# Altium PCB DE-290817.PcbDoc (part 2 of 2)
Units mil, origin at the board's own origin, x right, y up, seen from the top; angles counter-clockwise.
Board outline 2755.91 x 5118.11 mil, 2 copper layers (Top Layer, Bottom Layer); 176 components, 108 nets, 554 pads, 271 vias.
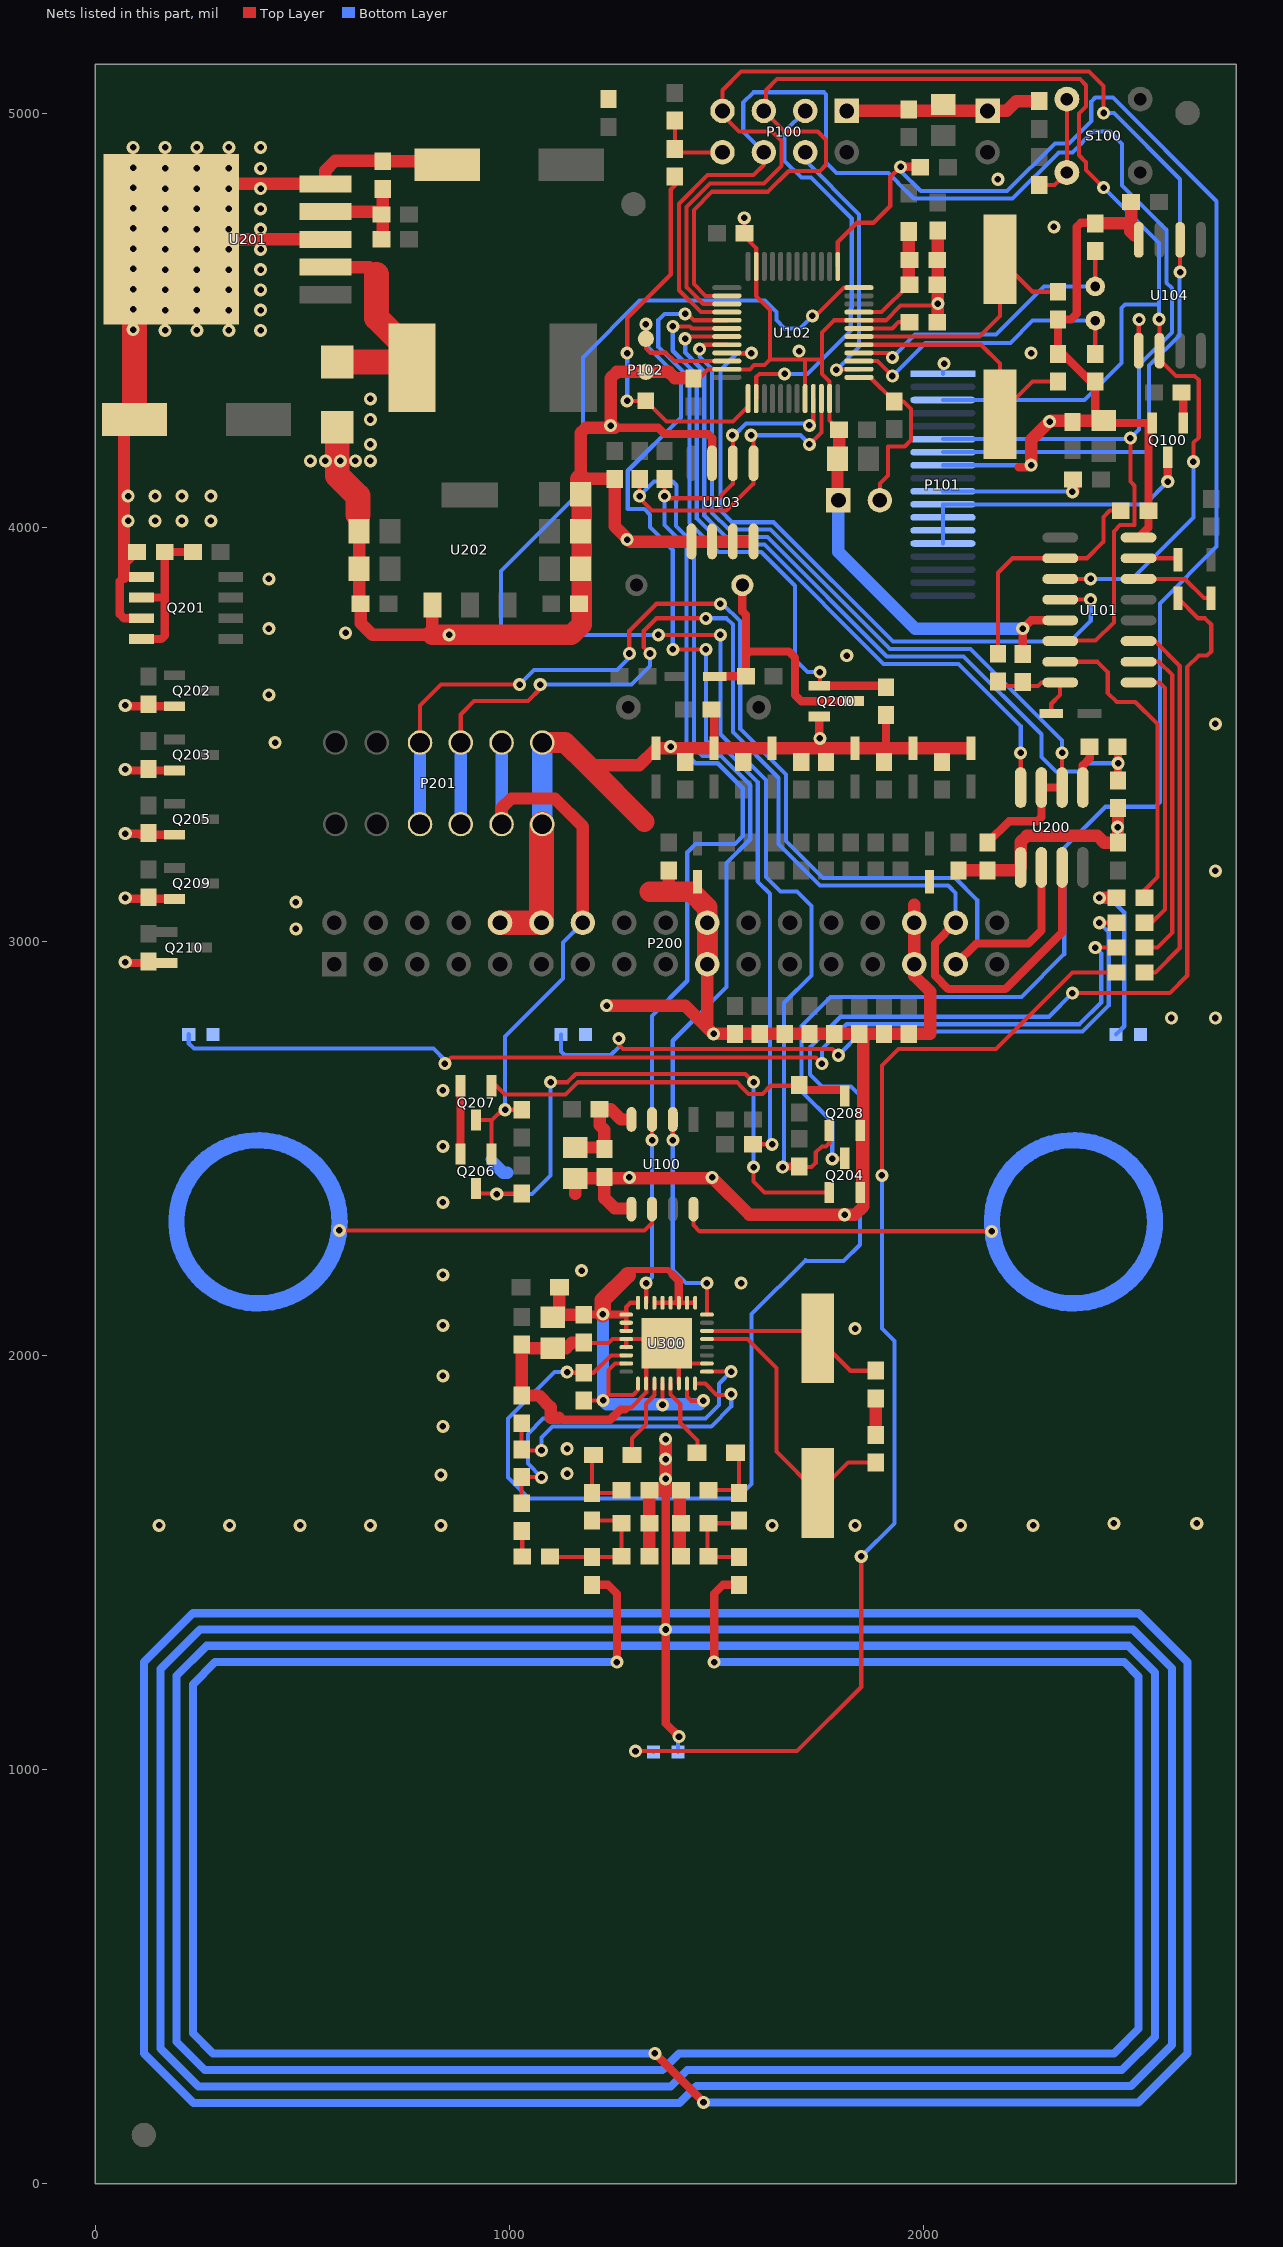
[diagram p2: the nets of this part, all layers, seen from the top]

## Via types
v1: diameter 31.5, hole 15.75, Top Layer to Bottom Layer, 271 vias

## Nets (pads, with @x,y where several pads share a name; then routed paths per layer and width w, separated by ;. In a path a pad name is that pad's centre, name@x,y a point inside that pad or via, vN(x,y) a via of type N, cw(c..) or ccw(c..) an arc to the next point about the centre after c; other vN are vias at no path point) (continued)
I2C1_SCL: R112.1 U100.3 U102.45 U103.6 U300.31 | length 2871.2
  Top Layer w10: U300.31@1330.79,2127.44 v1(1330.79,2175) ; v1(1345,2520) U100.3@1345,2570 ; R112.1@1375,4116.54 v1(1375,4075) 1375,4070 1505,4070 1540,4105 U103.6@1540,4154.49 1540,4221 v1(1539,4222) ; v1(1725,4246) 1734.21,4255.21 U102.45@1734.21,4310.55
  Bottom Layer w10: v1(1330.79,2175) 1345,2189.21 v1(1345,2520) 1345,2820 1430,2905 1430,3215 1450,3235 1545,3235 1564,3254 1564,3369.63 1503.63,3430 1450,3430 1428,3452 1428,3952 1375,4005 v1(1375,4075) ; v1(1539,4222) 1543.34,4222 1572.09,4250.75 1720.25,4250.75 v1(1725,4246)
I2C1_SDA: R111.1 U100.2 U102.46 U103.5 U300.24 | length 3153.7
  Top Layer w10: R111.1@1315,4116.54 v1(1315,4075) 1315,4070 1345,4040 1525,4040 1590,4105 U103.5@1590,4154.49 1590,4216 v1(1584,4222) ; v1(1395,2520) U100.2@1395,2570 ; U300.24@1477.44,2098.9 v1(1477.44,2175) ; v1(1725,4200) 1753.9,4228.9 U102.46@1753.9,4310.55
  Bottom Layer w10: v1(1315,4075) 1350,4110 1395,4110 1403.75,4101.25 1403.75,4063.09 1403,4062.34 1403,4002.46 1446,3959.46 1446,3469 1467,3448 1511.09,3448 1582,3377.09 1582,3246.54 1525,3189.54 1525,2890 1395,2760 v1(1395,2520) 1395,2207 1427,2175 v1(1477.44,2175) ; v1(1584,4222) 1703,4222 v1(1725,4200)
LED_DOOR_BELL: R100.2 U101.2 | length 799.2
  Top Layer w10: U101.2@2519.49,3675 2569,3675 2601,3643 2601,3021 2565,2985 R100.2@2533.46,2985
LED_HANDMAID: R103.2 U101.15 | length 758.7
  Top Layer w10: U101.15@2330.51,3675 2420,3675 2445,3650 2445,3600 2467,3578 2511.6,3578 2565,3524.6 2565,3155 2533.46,3123.46 R103.2@2533.46,3105
LED_RFID_READER: R106.2 U101.3 | length 915.3
  Top Layer w10: U101.3@2519.49,3725 2559,3725 2619,3665 2619,2984 2560,2925 R106.2@2533.46,2925
LED_ROOM_STATUS: R102.2 U101.1 | length 666.7
  Top Layer w10: U101.1@2519.49,3625 2570,3625 2583,3612 2583,3077 2551,3045 R102.2@2533.46,3045
NetC103_1: C103.1 D103.1 R104.1 U101.16 | length 238
  Top Layer w10: R104.1@2180,3616.54 2240,3616.54 2276.54,3616.54 2285,3625 U101.16@2330.51,3625 2330,3624.49 2330,3595 2308.74,3573.74 D103.1@2308.74,3550
NetC104_2: C104.2 R104.2 U101.10 | length 600.4
  Top Layer w10: R104.2@2180,3683.46 2180,3890 2215,3925 U101.10@2330.51,3925 2395,3925 2435,3965 2435,4025 2450,4040 C104.2@2476.54,4040
NetC105_1: C105.1 C106.2 R105.1 U100.4 | length 244.8
  Top Layer w30: C106.2@1160,2502.4 1226.06,2502.4 C105.1@1230,2498.46 1230,2545 1218.46,2556.54 R105.1@1218.46,2595 1245,2595 1270,2570 1280,2570
NetC113_1: C113.1 U102.7 | length 133.4
  Top Layer w10: U102.7@1844.45,4479.84 1924.84,4479.84 1940,4495 C113.1@1971.54,4495
NetC121_2: C121.2 C122.2 L100.2 U102.9 | length 276.5
  Top Layer w10: U102.9@1844.45,4519.21 1899.21,4519.21 1965,4585 C122.2@1965,4586.54
  Top Layer w30: C122.2@1965,4586.54 L100.2@1965,4713.74
NetC211_2: C211.2 R234.1 R235.1 U201.4 | length 261.2
  Top Layer w30: U201.4@556.22,4761.93 684.61,4761.93 C211.2@691.54,4755 ; R235.1@691.54,4695 695,4698.46 R234.1@695,4816.54
NetC304_1: C304.1 C305.1 C306.2 C308.2 R303.2 | length 328.3
  Top Layer w10: C304.1@1098.46,1515 1100,1513.46 R303.2@1200,1513.46 1269.57,1513.46 C308.2@1271.54,1515.43 C306.2@1271.54,1595 1265,1601.54 C305.1@1200,1601.54
NetC304_2: C304.2 R302.1 | length 62.2
  Top Layer w10: R302.1@1030,1576.54 1031.54,1575 C304.2@1031.54,1515
NetC305_2: C305.2 C307.2 L301.2 | length 169.5
  Top Layer w10: L301.2@1203.74,1760 1200,1756.26 C305.2@1200,1668.46 1265,1668.46 C307.2@1271.54,1675 C307.2@1270,1676.54
NetC309_1: C309.1 C311.1 C312.1 R304.2 | length 236.2
  Top Layer w10: R304.2@1555,1513.46 1480.43,1513.46 1478.46,1515.43 1478.46,1595 1548.46,1595 C312.1@1555,1601.54
NetC310_1: C310.1 C312.2 L302.2 | length 181.6
  Top Layer w10: C310.1@1480,1676.54 1478.46,1675 1548.46,1675 C312.2@1555,1668.46 1555,1756.26 L302.2@1546.26,1765
NetD100_1: D100.1 R100.1 | length 2534
  Top Layer w10: v1(845,2705) 860,2720 1740,2720 v1(1755,2705) ; v1(2415,2985) R100.1@2466.54,2985
  Bottom Layer w10: D100.1@226.38,2775.59 226.38,2753.62 239,2741 817,2741 845,2713 v1(845,2705) ; v1(1755,2705) 1755,2740 1815,2800 2377,2800 2429.47,2852.47 2429.47,2970.53 v1(2415,2985)
NetD102_1: D102.1 R102.1 | length 1720.6
  Top Layer w10: v1(1265,2765) 1265,2750 1275,2740 1780,2740 v1(1795,2725) ; v1(2425,3045) R102.1@2466.54,3045
  Bottom Layer w10: D102.1@1125.47,2775 1125.47,2734.53 1135,2725 1245,2725 1265,2745 v1(1265,2765) ; v1(1795,2725) 1852,2782 2384.46,2782 2447.47,2845.02 2447.47,3022.53 v1(2425,3045)
NetD104_1: D104.1 R103.1 | length 418.5
  Top Layer w30: v1(2425,3105) R103.1@2466.54,3105
  Bottom Layer w10: v1(2425,3105) 2450,3105 2485,3070 2485,2795.12 D104.1@2465.47,2775.59
NetD105_1: D105.1 R106.1 | length 2858.6
  Top Layer w10: v1(1305,1045) 1695,1045 1850,1200 v1(1850,1515) ; v1(1900,2435) 1900,2700 1940,2740 2175,2740 2360,2925 R106.1@2466.54,2925
  Bottom Layer w10: v1(1305,1045) 1346.73,1045 D105.1@1348.42,1043.31 ; v1(1850,1515) 1930,1595 1930,2035 1900,2065 v1(1900,2435)
NetD106_1: D106.1 U101.6 | length 194.7
  Top Layer w10: U101.6@2519.49,3875 2631,3875 2677.26,3828.74 D106.1@2695,3828.74
NetD107_1: D107.1 U101.7 | length 97.1
  Top Layer w10: U101.7@2519.49,3925 2611.26,3925 D107.1@2615,3921.26
NetD204_2: D204.2 Q200.3 R202.1 R205.2 | length 664.6
  Top Layer w20: D204.2@1496.26,3640 R205.2@1571.54,3640 1571.54,3691.54 ; R202.1@1562.95,3860 1562.95,3797.05 1571.54,3788.46 1571.54,3691.54 ; Q200.3@1831.34,3580 1705,3580 1690,3595 1690,3685 1675,3700 1580,3700 1571.54,3691.54
NetD209_1: D209.1 L200.1 U201.2 | length 577.3
  Top Layer w30: U201.2@556.22,4628.07 661.93,4628.07 680,4610
  Top Layer w60: D209.1@585,4398.74 751.38,4398.74 L200.1@765.12,4385 765.12,4419.88 680,4505 680,4610
NetP101_10: P101.10 R107.2 | length 344.3
  Top Layer w30: v1(2360,4085) 2361.54,4086.54 R107.2@2361.54,4115
  Bottom Layer w10: P101.10@2047.24,4086.61 2047.24,4086.25 2358.75,4086.25 v1(2360,4085)
NetP101_11: P101.11 P101.12 P101.13 P101.14 Q100.3 | length 718.6
  Top Layer w20: v1(2590,4110) Q100.3@2590,4168.66
  Bottom Layer w10: P101.14@2047.24,3960.63 P101.13@2047.24,3992.13 P101.12@2047.24,4023.62 P101.11@2047.24,4055.12 2535.12,4055.12 v1(2590,4110)
NetP103_2: P103.2 R115.1 U102.1 | length 431.8
  Top Layer w10: U102.1@1844.45,4361.73 1871.73,4361.73 R115.1@1930,4303.46 1951.54,4303.46 1970,4285 1970,4210 1955,4195 1915,4195 1915,4125 1895,4105 P103.2@1895,4065
NetQ100_1: Q100.1 R108.2 | length 75.3
  Top Layer w20: R108.2@2623.46,4325 2627.4,4321.06 Q100.1@2627.4,4251.34
NetQ201_2: Q201.2 Q201.4 R220.1 R221.1 | length 385.8
  Top Layer w20: Q201.4@112.13,3730 160,3730 168.46,3738.46 168.46,3830 ; Q201.2@112.13,3830 168.46,3830 ; R220.1@236.54,3940 R221.1@168.46,3940 168.46,3830
NetQ204_1: Q204.1 Q206.3 R224.2 | length 1423.6
  Top Layer w10: Q206.3@923.66,2400 932.13,2391.54 R224.2@1030,2391.54 ; v1(1100,2660) 1140.66,2660 1160.66,2680 1570,2680 v1(1590,2660) ; v1(1590,2455) 1590,2420 1616.34,2393.66 Q204.1@1772.6,2393.66
  Bottom Layer w10: v1(970,2390) 1055,2390 1100,2435 v1(1100,2660) ; v1(1590,2455) v1(1590,2660)
NetQ207_1: Q207.1 Q208.3 R231.1 | length 900.4
  Top Layer w10: Q207.1@957.4,2651.34 968.66,2651.34 990,2630 1136.11,2630 1166.11,2660 1550,2660 1561.25,2648.75 1561.25,2648.09 1578.09,2631.25 1611.25,2631.25 1631.34,2651.34 1697.87,2651.34 R231.1@1700,2653.46
  Top Layer w20: R231.1@1700,2653.46 1712.13,2641.34 Q208.3@1810,2641.34
NetR101_1: R101.1 S100.1 S100.4 | length 256
  Top Layer w10: R101.1@2280,4826.54 2316.54,4826.54 S100.4@2346.42,4856.42 S100.1@2346.42,5033.58
NetR227_1: R227.1 U200.1 | length 105.4
  Top Layer w20: U200.1@2385,3371.46 2385,3425 2401.54,3441.54 R227.1@2401.54,3470
NRF24L01_CE: P100.3 U102.38 | length 959.1
  Top Layer w10: U102.38@1596.42,4310.55 1596.42,4362.33 1604.09,4370 v1(1665,4370)
  Bottom Layer w10: v1(1665,4370) 1720,4370 1824.77,4474.77 1824.77,4527.77 1827,4530 1827,4745.39 1728.34,4844.04 1705.5,4844.04 1665,4884.54 1665,4955 P100.3@1715,5005
NRF24L01_CSN: P100.4 U102.2 | length 673.8
  Top Layer w10: v1(1790,4380) 1782.83,4380 1781.42,4381.42 U102.2@1844.45,4381.42
  Bottom Layer w10: P100.4@1715,4905 1715,4885 1845,4755 1845,4435 v1(1790,4380)
NRF24L01_IRQ: P100.8 R110.2 R114.1 | length 186.6
  Top Layer w10: R114.1@1400,4981.54 R110.2@1400,4913.46 1408.46,4905 P100.8@1515,4905
ONE_WIRE: P200.14 P201.2 Q206.1 Q207.3 R225.1 | length 1435.1
  Top Layer w10: Q207.3@920,2568.66 958.66,2568.66 983.46,2593.46 v1(990,2593.46) R225.1@1030,2593.46 ; 953.66,2568.66 957.4,2564.92 Q206.1@957.4,2486.34
  Top Layer w30: P201.2@981.57,3283.15 981.57,3321.57 1005,3345 1110,3345 1177.95,3277.05 P200.14@1177.95,3045
  Bottom Layer w10: v1(990,2593.46) 990,2770 1130,2910 1130,2997.05 P200.14@1177.95,3045
  Bottom Layer w30: P201.2@981.57,3283.15 P201.2@981.57,3480
ONE_WIRE_RX: Q204.3 R226.2 U102.13 | length 4520.9
  Top Layer w10: v1(1780,2475) 1808.66,2475 Q204.3@1810,2476.34 ; U102.13@1793.27,4629.45 1793.27,4688.27 1840,4735 1879.54,4735 1920,4775.46 1920,4845 v1(1945,4870)
  Top Layer w20: v1(1945,4870) 1991.54,4870 R226.2@1992.54,4869
  Bottom Layer w10: v1(1780,2475) 1780,2564 1706,2638 1706,2796 1776,2866 2237,2866 2340,2969 2340,3225 2440,3325 2560,3325 2571,3336 2571,3816 2708,3953 2708,4787 2458,5037 2415,5037 2405.5,5027.5 2405.5,4980.5 2351.5,4926.5 2317.5,4926.5 2202.25,4811.25 1993.75,4811.25 1945,4860 v1(1945,4870)
ONE_WIRE_TX: Q208.1 R230.1 U102.12 | length 3684.2
  Top Layer w10: v1(1360,3740) v1(1510,3740) ; R230.1@1700,2456.54 1701.54,2455 1730,2455 1740,2465 1740,2490 1755,2505 1765,2505 1772.6,2512.6 Q208.1@1772.6,2543.66 ; v1@1732,4511 1741,4511 1808.27,4578.27 U102.12@1844.45,4578.27
  Top Layer w20: v1@1660,2456.54 R230.1@1700,2456.54
  Bottom Layer w10: v1(1360,3740) 1000,3740 980,3760 980,3894.54 1178,4092.54 1178,4410 1315,4547 1617.34,4547 1645,4519.34 1645,4500 1665,4480 1702,4480 v1(1732,4510) ; v1(1510,3740) 1510,3500 1620,3390 1620,3155 1655,3120 1695,3120 1730,3085 1730,2918 1663.75,2851.75 1663.75,2458.75 v1(1660,2455)
OSC32_IN: C109.1 U102.3 Y101.2 | length 721.1
  Top Layer w10: U102.3@1844.45,4401.1 1888.9,4401.1 v1(1925,4365) ; C109.1@2415,4418.46 Y101.2@2415,4498.66
  Bottom Layer w10: v1(1925,4365) 2005,4445 2210,4445 2263.66,4498.66 Y101.2@2415,4498.66
OSC32_OUT: C112.1 U102.4 Y101.1 | length 731.2
  Top Layer w10: U102.4@1844.45,4420.79 1914.21,4420.79 v1(1925,4410) ; Y101.1@2415,4581.34 C112.1@2415,4666.54
  Bottom Layer w10: v1(1925,4410) 1980,4465 2175,4465 2291.34,4581.34 Y101.1@2415,4581.34
OSC_IN: C107.1 U102.5 Y100.2 | length 653.9
  Top Layer w10: U102.5@1844.45,4440.47 2139.53,4440.47 2185,4395 Y100.2@2185,4272.99 2263.54,4351.54 C107.1@2325,4351.54
OSC_OUT: C108.1 U102.6 Y100.1 | length 670.7
  Top Layer w10: U102.6@1844.45,4460.16 2135.16,4460.16 2185,4510 Y100.1@2185,4647.01 2263.54,4568.46 C108.1@2325,4568.46
OSCIN: C313.2 U300.21 Y300.1 | length 710.4
  Top Layer w10: U300.21@1477.44,2039.84 1575.16,2039.84 1645,1970 1645,1767.99 Y300.1@1745,1667.99 1818.54,1741.54 C313.2@1885,1741.54
OSCOUT: C314.2 U300.22 Y300.2 | length 447.3
  Top Layer w10: U300.22@1477.44,2059.53 1727.48,2059.53 Y300.2@1745,2042.01 1823.54,1963.46 C314.2@1885,1963.46
RC522_RST: D107.2 R301.1 U300.6 | length 4398.9
  Top Layer w10: v1(1140,1960) 1141.54,1958.46 R301.1@1180,1958.46 1203.46,1958.46 1245.47,2000.47 U300.6@1282.56,2000.47 ; v1(2360,2875) 2595,2875 2637,2917 2637,3662 2665,3690 2685,3690 2695,3700 2695,3765 2680,3780 2663.74,3780 D107.2@2615,3828.74
  Bottom Layer w10: v1(1140,1960) 1109,1960 997,1848 997,1706 1048,1655 1550,1655 1585,1690 1585,2100 1715,2230 1717,2228 1807.54,2228 1847,2267.46 1847,2628 1825,2650 1755,2650 1726.25,2678.75 1726.25,2744.25 1800,2818 2303,2818 v1(2360,2875)
RS485_A: P200.31 P201.4 U200.6 | length 2883.4
  Top Layer w10: P201.4@784.72,3480 784.72,3569.72 835,3620 v1(1025,3620) ; v1(1290,3695) 1290,3750 1355,3815 v1(1510,3815)
  Top Layer w20: P200.31@2077.95,2945 2127.95,2995 2254,2995 2285,3026 U200.6@2285,3178.54
  Bottom Layer w10: v1(1025,3620) 1060,3655 1260,3655 1290,3685 v1(1290,3695) ; v1(1510,3815) 1515.46,3815 1558,3772.46 1558,3512.46 1668,3402.46 1668,3242.46 1757.46,3153 2077,3153 2130,3100 2130,2997.05 P200.31@2077.95,2945
  Bottom Layer w30: P201.4@784.72,3283.15 P201.4@784.72,3480
RS485_B: P200.32 P201.3 U200.7 | length 2902.6
  Top Layer w10: P201.3@883.15,3480 883.15,3548.15 915,3580 1045,3580 1075,3610 v1(1075,3620) ; v1(1340,3695) 1325,3710 1325,3750 1355,3780 v1(1475,3780)
  Top Layer w20: P200.32@2077.95,3045 2028,2995.05 2028,2917 2060,2885 2198,2885 2335,3022 U200.7@2335,3178.54
  Bottom Layer w10: v1(1075,3620) 1295,3620 1340,3665 v1(1340,3695) ; v1@1480,3780 1525,3780 1540,3765 1540,3505 1650,3395 1650,3235 1750,3135 2060,3135 2077.95,3117.05 P200.32@2077.95,3045
  Bottom Layer w30: P201.3@883.15,3283.15 P201.3@883.15,3480
RS485_DIR: R117.1 U102.32 U200.2 U200.3 | length 1940.9
  Top Layer w10: v1(1460,4430) 1470.47,4440.47 U102.32@1525.55,4440.47 ; U200.2@2335,3371.46 v1(2335,3455)
  Top Layer w20: R117.1@2155,3238.46 2206.54,3290 2275,3290 2285,3300 U200.3@2285,3371.46 U200.2@2335,3371.46
  Bottom Layer w10: v1(1460,4430) 1460,4411.82 1490,4381.82 1490,4034.54 1530.54,3994 1631,3994 1919,3706 2114,3706 2335,3485 v1(2335,3455)
RX: R300.2 R302.2 U300.17 | length 873
  Top Layer w10: R302.2@1030,1643.46 R300.2@1030,1706.54 1077.46,1706.54 v1(1078,1706) ; U300.17@1477.44,1961.1 1535.9,1961.1 v1(1536,1961)
  Bottom Layer w10: v1(1078,1706) 1045,1739 1045,1811 1082,1848 1474,1848 1507,1881 1507,1932 v1(1536,1961) v1@1535,1962
SHIFT_CLK: U101.12 U102.33 | length 1661.4
  Top Layer w10: U102.33@1525.55,4420.79 1584.21,4420.79 v1(1585,4420) ; U101.12@2330.51,3825 v1(2404,3825)
  Bottom Layer w10: v1(1585,4420) 1550,4420 1510,4380 1510,4040 1538,4012 1638.46,4012 1926.46,3724 2354,3724 2404,3774 v1(2404,3825)
SOUND_PWM: Q200.1 R211.2 U102.29 | length 1474.1
  Top Layer w10: v1@1425,4525 v1(1425,4515) 1431.11,4515 1446.58,4499.53 U102.29@1525.55,4499.53 ; Q200.1@1748.66,3617.4 1750,3618.74 v1(1750,3650)
  Top Layer w20: Q200.1@1748.66,3617.4 1906.06,3617.4 R211.2@1910,3613.46
  Bottom Layer w10: v1(1425,4515) 1375,4515 1360,4500 1360,4435.46 1435,4360.46 1435,4010 1505,3940 1608.63,3940 1690,3858.63 1690,3680 1720,3650 v1(1750,3650)
SPI2_MISO: P100.7 P101.7 U102.27 U104.2 | length 3398.1
  Top Layer w10: U102.27@1525.55,4538.9 1468.56,4538.9 1428,4579.46 1428,4773.46 1484.54,4830 1615,4830 1657.53,4872.53 1657.53,4932.47 1635,4955 1555,4955 1515,4995 P100.7@1515,5005 1515,5055 1560,5100 2400,5100 2435,5065 v1(2435,5000) ; v1(2620,4616) U104.2@2620,4693.86
  Bottom Layer w10: P101.7@2047.24,4181.1 2537.9,4181.1 2545,4188.2 2545,4390 2618,4463 2618,4614 v1(2620,4616) 2620,4840 2460,5000 v1(2435,5000)
SPI2_MOSI: P100.6 P101.6 U101.14 U102.28 U104.5 | length 4045.6
  Top Layer w10: U102.28@1525.55,4519.21 1462.79,4519.21 1410,4572 1410,4780.91 1479.09,4850 1590,4850 1615,4875 P100.6@1615,4905 ; U101.14@2330.51,3725 2331.51,3726 2416,3726 2460,3770 2460,3990 2475,4005 2510,4005 2510,4100 2500,4110 v1(2500,4215) ; U104.5@2520,4426.14 2520,4500 v1(2521,4501)
  Bottom Layer w10: P100.6@1615,4905 1565,4955 1565,5025 1590,5050 1760,5050 1765,5045 1765,4880 1790,4855 1915.66,4855 1938.75,4831.91 1938.75,4831.25 1976.75,4793.25 2215.25,4793.25 2327,4905 2360,4905 2410,4955 2450,4955 2480,4925 2480,4825 2587,4718 2587,4590 2600,4577 2600,4470.46 2522.27,4392.73 ; P101.6@2047.24,4212.6 2497.6,4212.6 v1(2500,4215) 2521,4236 v1(2521,4501)
SPI2_SCK: P100.5 P101.3 U101.11 U102.26 U104.6 | length 3997.9
  Top Layer w10: U102.26@1525.55,4558.58 1474.33,4558.58 1446,4586.91 1446,4766 1490,4810 1625,4810 1675,4860 1750,4860 1765,4875 1765,4935 1745,4955 1665,4955 P100.5@1615,5005 1620,5010 1620,5055 1647,5082 2378,5082 2393,5067 2393,5015.75 2376,4998.75 2376,4898 2393,4881 2393,4862 v1(2435,4820) ; U101.11@2330.51,3875 v1(2404,3875) ; v1(2569,4502) 2570,4501 U104.6@2570,4426.14 2570,4405 2610,4365 2655,4365 2665,4355 2665,4217 2652,4204 2652,4168 v1@2660,4160
  Bottom Layer w10: P101.3@2047.24,4307.09 2389.09,4307.09 2478,4396 2478,4529 2487,4538 2569,4538 ; v1(2404,3875) 2504,3875 2652,4023 v1(2652,4158) ; v1(2435,4820) 2569,4686 2569,4538 ; v1(2569,4502) 2569,4538
SWCLK: P102.1 R110.1 U102.37 | length 935.6
  Top Layer w10: v1(1285,4305) P102.1@1330,4305 1380,4255 1540,4255 1576.73,4291.73 U102.37@1576.73,4310.55 ; v1(1285,4420) 1285,4505 1390,4610 1390,4815 1400,4825 R110.1@1400,4846.54
  Bottom Layer w10: v1(1285,4305) v1(1285,4420)
SWDIO: P102.3 R109.1 U102.34 | length 2610.6
  Top Layer w10: v1(1330,4490) P102.3@1330,4455 1330,4432 1341,4421 1379,4421 1398.9,4401.1 U102.34@1525.55,4401.1 ; v1(1395,3705) v1(1475,3705) ; R109.1@1588.46,2510 v1(1635,2510)
  Bottom Layer w10: v1(1330,4490) 1330,4440 1415,4355 1415,4265 1286.25,4136.25 1286.25,4043.75 1326.25,4043.75 1340,4030 1340,4000 1395,3945 v1(1395,3705) ; v1(1475,3705) 1475,3485 1490,3470 1514.54,3470 1600,3384.54 1600,3145 1630,3115 1630,2515 v1(1635,2510)
TOUCH_PAD1: U100.8 | length 2001.5
  Top Layer w10: U100.8@1445,2353.46 1445,2315 1460,2300 v1(2165,2300)
  Bottom Layer w39.37: 2559.06,2322.83 ccw(c2362.2,2322.83) 2559.06,2322.83
TOUCH_PAD2: U100.6 | length 2032.7
  Top Layer w10: v1(590,2302.06) 1327.06,2302.06 1345,2320 U100.6@1345,2353.46
  Bottom Layer w39.37: 590.55,2322.83 ccw(c393.7,2322.83) 590.55,2322.83
TX1: L301.1 U300.11 | length 195
  Top Layer w10: L301.1@1296.26,1760 1296.26,1800.26 1330,1834 1330,1883.66 1350.47,1904.13 U300.11@1350.47,1932.56
TX2: L302.1 U300.13 | length 174.5
  Top Layer w10: U300.13@1389.84,1932.56 1389.84,1906.16 1413,1883 1413,1837 1455,1795 1455,1785
USART1_RX: R227.2 R228.1 U102.31 | length 1926.3
  Top Layer w10: v1(1425,4455) 1430.16,4460.16 U102.31@1525.55,4460.16
  Top Layer w20: R227.2@2468.46,3470 2470,3468.46 v1(2470,3430) R228.1@2470,3388.46
  Bottom Layer w10: v1(1425,4455) 1425,4421.37 1471,4375.37 1471,4028.09 1523.09,3976 1623.54,3976 1911.54,3688 2097,3688 2285,3500 2285,3445 2320,3410 2375,3410 2395,3430 v1(2470,3430)
USART1_TX: U102.30 U200.4 | length 1759
  Top Layer w10: v1(1395,4485) 1395.46,4484.54 1436.11,4484.54 1440.81,4479.84 U102.30@1525.55,4479.84 ; U200.4@2235,3371.46 v1(2235,3455)
  Bottom Layer w10: v1(1395,4485) 1395,4425.91 1453,4367.91 1453,4020.63 1515.63,3958 1616.09,3958 1904.09,3670 2085,3670 2235,3520 v1(2235,3455)
VDD: C301.2 C302.2 L300.2 R301.2 U300.1 U300.2 U300.3 U300.7 U300.9 U300.12 U300.15 U300.25 U300.26 U300.27 U300.28 U300.29 U300.30 U300.32 | length 1614.4
  Top Layer w10: R301.2@1180,1891.54 v1(1226.54,1891.54) 1240,1905 ; C302.2@1180,2098.46 C302.2@1180.43,2098.9 ; U300.7@1282.56,1980.79 1255.79,1980.79 1240,1965 1240,1905 ; U300.3@1282.56,2059.53 U300.2@1282.56,2079.21 U300.1@1282.56,2098.9 1282.56,2117.56 1292.44,2127.44 U300.32@1311.1,2127.44 ; U300.9@1311.1,1932.56 1311.1,1916.56 1299.54,1905 1240,1905 ; U300.30@1350.47,2127.44 U300.29@1370.16,2127.44 U300.28@1389.84,2127.44 U300.27@1409.53,2127.44 U300.26@1429.21,2127.44 U300.25@1448.9,2127.44 ; v1(1370.16,1881) U300.12@1370.16,1932.56 ; U300.15@1429.21,1932.56 1429.21,1900.79 1439,1891 v1(1469,1891)
  Top Layer w15: 1275,2195 1286.25,2206.25 1383.75,2206.25 1395,2195
  Top Layer w20: C302.2@1180.43,2098.9 U300.1@1282.56,2098.9 ; 1395,2195 1409.53,2180.47 U300.27@1409.53,2127.44
  Top Layer w30: C301.2@1105,2092.4 C301.2@1111.06,2098.46 ; L300.2@1121.26,2165 1121.26,2108.66 C301.2@1111.06,2098.46 ; C302.2@1180,2098.46 C301.2@1111.06,2098.46
  Top Layer w39.37: v1(1226,2100) 1226,2134 1286,2194
  Bottom Layer w30: v1(1226,2100) 1226.54,2099.46 v1(1226.54,1891.54) 1236.07,1882 1460,1882 v1(1469,1891)
VMID: C303.2 R300.1 U300.16 | length 761.5
  Top Layer w10: C303.2@1030,1836.54 R300.1@1030,1773.46 1032.46,1771 v1(1078,1771) ; U300.16@1448.9,1932.56 1473.44,1932.56 1501,1905 1534,1905 v1(1536,1907)
  Bottom Layer w10: v1(1078,1771) 1078,1802 1105,1829 1488,1829 1536,1877 v1(1536,1907)
VSS: C100.2 C101.2 C102.1 C103.2 C104.1 C105.2 C106.1 C107.2 C108.2 C109.2 C110.1 C111.2 C112.2 C113.2 C114.2 C115.2 C116.1 C117.1 C118.1 C119.1 C120.1 C121.1 C122.1 C200.2 C201.1 C202.1 C203.1 C204.1 C205.1 C206.1 C207.1 C208.1 C209.1 C212.2 C213.2 C214.1 C215.1 C216.1 C217.1 C218.1 C219.1 C220.1 C221.1 C300.1 C301.1 C302.1 C303.1 C306.1 C307.1 C308.1 C309.2 C310.2 C311.2 C313.1 C314.1 D100.2 D101.1 D102.2 D104.2 D105.2 D200.2 D201.2 D202.2 D203.2 D205.2 D206.2 D207.2 D208.2 D209.2 P100.1 P101.1 P101.8 P102.2 P103.1 P200.10 P200.12 P200.19 P200.20 P200.29 P200.30 P201.1 Q100.2 Q200.2 Q201.1 Q201.3 Q202.2 Q203.2 Q204.2 Q205.2 Q206.2 Q207.2 Q208.2 Q209.2 Q210.2 R117.2 R201.2 R203.2 R204.2 R206.2 R211.1 R216.2 R217.2 R218.2 R219.2 R221.2 R222.1 R223.1 R228.2 R229.1 R232.1 R233.1 R234.2 R303.1 R304.1 U100.5 U101.8 U101.13 U102.8 U102.23 U102.35 U102.44 U102.47 U103.1 U103.2 U103.3 U103.4 U103.7 U104.4 U200.5 U201.3 U201.5 U201.6 U202.1 U300.4 U300.5 U300.10 U300.14 U300.18 U300.33 | length 46117.4
  Top Layer w10: C302.1@1180,2031.54 1181.54,2030 1240,2030 1249.84,2039.84 U300.4@1282.56,2039.84 ; 1280,1870 1285,1875 1295,1875 1330.79,1910.79 U300.10@1330.79,1932.56 1330.79,1980.79 U300.33@1380,2030 ; U300.5@1282.56,2020.16 U300.4@1282.56,2039.84 ; U300.14@1409.53,1932.56 U300.33@1409.53,2000.47 ; C118.1@1445,4358.46 1458.46,4358.46 1481.42,4381.42 U102.35@1525.55,4381.42 1525.97,4381 1581,4381 1591.25,4391.25 1616.25,4391.25 1630,4405 ; U300.18@1477.44,1980.79 1429.21,1980.79 U300.33@1409.53,2000.47 ; v1(1567.54,4746.54) 1568.46,4745.61 C117.1@1568.46,4710 ; C117.1@1573.46,4710 1573.46,4696.54 1596.42,4673.58 U102.23@1596.42,4629.45 1596.42,4558.58 1630,4525 1630,4405 ; U102.44@1714.53,4310.55 1714.53,4405 ; C119.1@1796.54,4235 1773.58,4257.95 U102.47@1773.58,4310.55 1773.58,4351.42 1755,4370 1755,4405 ; v1@2030,4535 1945,4535 1909.53,4499.53 U102.8@1844.45,4499.53 1784.53,4499.53 1755,4470 1755,4405 ; U300.4@1282.56,2039.84 1370.16,2039.84 U300.33@1380,2030 ; U300.33@1380,2030 U300.33@1409.53,2000.47 ; 1630,4405 1714.53,4405 ; 1714.53,4405 1755,4405
  Top Layer w19.68: R303.1@1200,1446.54 1238.46,1446.54 1260,1425 1260,1260.16 v1(1259.84,1260) ; v1(1352,315) v1@1469.65,197.35 ; 1374,1676 1375,1675 1377.95,1672.05 v1(1377.95,1338.58) 1377.95,1112.05 v1(1410,1080) ; v1(1495,1260) 1495,1425 1516.54,1446.54 R304.1@1555,1446.54
  Top Layer w20: v1@73,2947.6 Q210.2@173.66,2947.6 ; v1@73,3102.6 Q209.2@173.66,3102.6 ; v1(73,3260) 106.54,3260 ; v1@73,3412.6 Q203.2@173.66,3412.6 ; v1@73,3567.6 Q202.2@173.66,3567.6 ; R221.2@101.54,3940 70,3908.46 70,3880 ; Q201.1@105,3880 70,3880 ; 108.94,3257.6 Q205.2@173.66,3257.6 ; Q201.3@112.13,3780 70,3780 60,3790 60,3870 70,3880 ; Q206.2@882.6,2486.34 Q207.2@882.6,2651.34 ; 1130,1845 1244,1845 1269,1870 1280,1870 ; v1@1255,4240 1360,4240 1375,4225 1480,4225 1490,4215 U103.7@1490,4154.49 ; C200.2@1488.46,3560 1495,3553.46 D202.2@1495,3466.26 ; 1745,3466.26 1748.66,3469.92 Q200.2@1748.66,3542.6 ; Q204.2@1847.4,2393.66 Q208.2@1847.4,2558.66 ; 1905,3466.26 1910,3471.26 R211.1@1910,3546.54 ; 2230,4145 2255,4145 v1(2260,4150) ; C103.2@2240,3683.46 v1(2240,3755) 2260,3775 U101.13@2330.51,3775 ; C110.1@2410,4257.4 2415,4262.4 C109.2@2415,4351.54 2409.23,4345.77 2336.54,4418.46 C107.2@2325,4418.46 C108.2@2325,4501.54 2356.54,4501.54 2370,4515 2370,4725 2380,4735 2413.46,4735 C112.2@2415,4733.46 ; C110.1@2435,4257.4 2441.06,4251.34 Q100.2@2552.6,4251.34 2543.46,4242.2 C104.1@2543.46,4040 2543.46,3998.98 U101.8@2519.49,3975
  Top Layer w30: 70,3880 70,4234.61 C212.2@95.39,4260 ; U201.3@556.22,4695 U201.6@184.17,4695 318.03,4828.86 U201.5@556.22,4828.86 556.22,4861.22 580,4885 693.46,4885 R234.2@695,4883.46 841.93,4883.46 C213.2@850.39,4875 ; C220.1@637.6,3990 C221.1@637.6,3900 637.6,3818.94 C219.1@641.54,3815 641.54,3768.46 670,3740 815,3740 814.45,3740.55 U202.1@814.45,3812.13 ; 1120,1850 1100,1850 1100,1875 1071.54,1903.46 C303.1@1030,1903.46 C300.1@1030,2026.54 1038.94,2017.6 C301.1@1105,2017.6 1137.6,2017.6 1151.54,2031.54 C302.1@1180,2031.54 ; 1160,2390 C106.1@1160,2427.6 C105.2@1226.06,2427.6 ; 1190,3425 1313.74,3425 D201.2@1355,3466.26 ; v1(1235,2845) 1425,2845 1477.95,2792.05 ; U100.5@1285,2355 1255,2355 1230,2380 C105.2@1230,2427.6 ; C308.1@1338.46,1515.43 C306.1@1338.46,1595 C307.1@1338.46,1675 1375,1675 1411.54,1675 C311.2@1411.54,1515.43 ; D201.2@1365,3466.26 D202.2@1495,3466.26 D203.2@1635,3466.26 1745,3466.26 1770,3466.26 ; 1374,1676 1378,1699.83 v1(1377.95,1798) ; 1385,3144.05 C201.1@1385,3171.54 ; C118.1@1445,4358.46 1443.46,4360 1400,4360 1385,4375 P102.2@1330,4375 1260,4375 1245,4360 1245,4250 1255,4240 1185,4240 1172.4,4227.4 1172.4,4115 1173.94,4116.54 C115.2@1255,4116.54 1255,4002 1292,3965 1575,3965 ; P200.19@1477.95,2945 1477.95,2792.05 ; C208.1@1765,3433.46 1765,3461.26 1770,3466.26 ; P103.1@1795,4065 1792.6,4067.4 C120.1@1792.6,4165 1796.54,4168.94 C119.1@1796.54,4235 ; P100.1@1815,5005 D101.1@2155,5005 2201,5005 2224.46,5028.46 C102.1@2280,5028.46 ; C313.1@1885,1808.46 C314.1@1885,1896.54 ; C207.1@1905,3433.46 1905,3466.26 ; 1977.95,3087.95 P200.30@1977.95,3045 P200.29@1977.95,2945 1977.95,2917.05 2016.54,2878.46 2016.54,2776.54 R216.2@1965,2776.54 R217.2@1905,2776.54 R218.2@1845,2776.54 ; C116.1@2035,4716.54 2035,4498.46 C113.2@2038.46,4495 ; C206.1@2045,3433.46 2045,3461.26 2050,3466.26 ; C205.1@2085,3171.54 R117.2@2155,3171.54 2218.46,3171.54 ; D206.2@2105,3466.26 2050,3466.26 ; U200.5@2235,3178.54 2235,3240 2250,3255 2420,3255 2436.54,3238.46 C209.1@2470,3238.46 R228.2@2470,3321.54 ; v1(2260,4150) 2260,4210 2307.4,4257.4 2410,4257.4 C110.1@2435,4257.4 ; C112.2@2415,4733.46 2500,4733.46 ; C114.2@2501.54,4785 2501.54,4735 2500,4733.46 ; U104.4@2509.43,4704.43 2500,4713.86 2500,4733.46 ; C105.2@1226.06,2427.6 C105.2@1230,2431.54 C105.2@1230,2427.6 ; C105.2@1226.06,2427.6 C105.2@1230,2427.6 ; C105.2@1230,2427.6 1492.4,2427.6 1580,2340 1835,2340 1855,2360 1855,2766.54 R218.2@1845,2776.54 ; 1477.95,2792.05 v1(1493.46,2776.54) R206.2@1545,2776.54 R204.2@1605,2776.54 R203.2@1665,2776.54 R201.2@1725,2776.54 R219.2@1785,2776.54 R218.2@1845,2776.54 ; 1770,3466.26 D208.2@1835,3466.26 1905,3466.26 ; 1905,3466.26 D207.2@1975,3466.26 2050,3466.26
  Top Layer w50: 815,3740 v1(855,3740) 1150,3740 1175,3765 1175,4112.4 1172.4,4115 ; P201.1@1080,3480 1135,3480 1190,3425 1325.95,3289.05 ; 1340,3120 1440,3120 1477.95,3082.05 P200.20@1477.95,3045 P200.19@1477.95,2945
  Top Layer w60: C212.2@95.39,4260 95.39,4606.22 U201.6@184.17,4695 ; D209.2@585,4241.26 585,4125 635,4075 635,4030 ; P200.10@977.95,3045 P200.12@1077.95,3045 1077.95,3281.1 P201.1@1080,3283.15
  Bottom Layer w10: D105.2@1407.48,1043.31 1407.48,1077.48 v1(1410,1080) ; P101.8@2047.24,4149.61 2259.61,4149.61 v1(2260,4150) ; P101.1@2047.24,4370.08 2047.24,4392.24 v1(2050,4395)
  Bottom Layer w19.68: v1@1259.84,1259.84 289.84,1259.84 236.22,1206.22 236.22,363.78 285,315 v1(1352,315) ; v1(1469.15,196.85) 2519.68,196.85 2637.8,314.96 2637.8,1259.84 2519.68,1377.95 236.22,1377.95 118.11,1259.84 118.11,314.96 238.07,195 1411,195 1452.22,236.22 2501.22,236.22 2600,335 2600,1245 2506.42,1338.58 v1(1377.95,1338.58) 253.58,1338.58 158,1243 158,327 250,235 1390,235 1430.01,275.01 2479.06,275.01 2559.06,355 2559.06,1235.16 2495,1299.21 269.21,1299.21 196.85,1226.85 196.85,343.15 265,275 1370,275 1410,315 2460,315 2519.68,374.68 2519.68,1224.68 ; v1@1496.06,1259.84 2485,1259.84 2519.68,1225.16
  Bottom Layer w20: 953,2474 963,2464
  Bottom Layer w30: 963,2464 986,2441 995,2441 ; P103.1@1795,4065 1795,3940 1980,3755 v1(2240,3755)
  Bottom Layer w50: P201.1@1080,3283.15 P201.1@1080,3480 ; P200.19@1477.95,2945 P200.20@1477.95,3045
  other v1: 155,1590 325,1590 495,1590 665,1590 835,1590 1635,1590 1835,1590 2090,1590 2265,1590 2460,1595 2660,1595 1377.95,1702 835,1712 1140,1715 1377.95,1750 1140,1775 840,1829 840,1951 1835,2065 840,2073 1560,2175 840,2195 1175,2205 1810,2340 840,2370 1290,2430 1490,2430 840,2505 840,2640 2599,2815 2705,2815 73,2950 485,3030 485,3095 73,3105 2705,3170 2469,3276 73,3415 1390,3470 435,3480 1750,3490 2705,3525 73,3570 420,3595 1815,3690 605,3745 420,3755 420,3875 1285,3970 80,4015 145,4015 210,4015 280,4015 80,4075 145,4075 210,4075 280,4075 520,4160 556.25,4160 592.5,4160 628.75,4160 665,4160 665,4200 1245,4245 2305,4255 665,4260 665,4310 2260,4420 1700,4425 169.18,4475 246.12,4475 323.06,4475 400,4475 92.24,4477.03 169.18,4523.89 246.12,4523.89 323.06,4523.89 400,4523.89 92.24,4525.92 2035,4540 169.18,4572.78 246.12,4572.78 323.06,4572.78 400,4572.78 92.24,4574.81 169.18,4621.67 246.12,4621.67 323.06,4621.67 400,4621.67 92.24,4623.7 169.18,4670.56 246.12,4670.56 323.06,4670.56 400,4670.56 92.24,4672.59 169.18,4719.44 246.12,4719.44 323.06,4719.44 400,4719.44 92.24,4721.48 2315,4725 169.18,4768.33 246.12,4768.33 323.06,4768.33 400,4768.33 92.24,4770.37 169.18,4817.22 246.12,4817.22 323.06,4817.22 400,4817.22 92.24,4819.26 2180,4840 169.18,4866.11 246.12,4866.11 323.06,4866.11 400,4866.11 92.24,4868.15 92.24,4917.03 169.18,4917.03 246.12,4917.03 323.06,4917.03 400,4917.03
pads on no net: FD100.3 FD200.3 FD201.3 P101.15 P101.16 P101.17 P101.18 P200.3 P200.4 P200.33 P200.34 U101.9 U300.8 U300.19 U300.20 U300.23

## Polygon pours and split planes (outlines as drawn)
VSS on Top Layer "Top Layer-No Net" (solid, remove dead copper, pour order 18): 1055,5100 1310,5100 1310,4990 1055,4990
VSS on Top Layer "Top Layer-No Net" (solid, remove dead copper, pour order 10): 1059.33,5136.22 1059.33,3696.89 1058.67,3696.22 800.67,3696.22 679.33,3574.89 679.33,3291.22 679.33,3261.22 679.33,3246.22 719.33,3246.22 724.33,3246.22 1128.67,3246.22 1128.67,3016.22 1328.67,3016.22 1335.67,3009.22 1335.67,2788.22 1268.67,2721.22 2.44,2721.22 2.44,5116.22 1059.33,5116.22
VSS on Top Layer "Top Layer-No Net" (solid, remove dead copper, pour order 8): 1395.76,5117.97 1395.76,4884.86 1245.76,4734.86 1245.76,4259.86 1240.76,4254.86 1190.76,4254.86 1190.76,4249.86 1170.76,4229.86 1170.76,3646.56 1110.43,3539.22 1030.43,3539.22 1030.43,3506.22 1030.43,3410.19 1050.76,3389.86 1150.76,3389.86 1150.76,3319.86 1185.76,3284.86 1190.76,3279.86 1190.76,2999.86 1325.76,2999.86 1325.76,2819.86 1230.76,2724.86 15.76,2724.86 10.76,2729.86 10.76,1499.86 2755.76,1499.86 2755.76,5117.97
GUARD_RING on Top Layer "Top Layer-No Net" (hatched 45Degree grid 30 track 5, pour order 0): 786.67,2710 786.67,1870 0.01,1870 1.67,2710
GUARD_RING on Top Layer "Top Layer-No Net" (hatched 45Degree grid 30 track 5, pour order 2): 1980,2690 2755.91,2690 2755.91,1875 1980,1875
VSS on Bottom Layer "Top Layer-No Net" (solid, pour order 16): 1015,5118.11 1016.89,5120 1415,5120 1415,4900 1405,4890 1280,4890 1215,4825 1215,4780 1090,4655 1065,4630 972,4630 972,5091.36
VSS on Bottom Layer "Top Layer-No Net" (solid, remove dead copper, pour order 14): 2757.74,1494.45 30.89,1494.45 30.89,1849.45 800.89,1849.45 800.89,2724.45 1230.89,2724.45 1335.89,2829.45 1335.89,2994.45 1190.89,2994.45 1190.89,3284.45 1155.89,3319.45 1150.89,3324.45 1150.89,3389.45 953.52,3389.45 953.52,3527.02 927.52,3553.02 790.52,3553.02 790.52,3659.08 790.52,3947.02 867.52,3947.02 1085.52,4165.02 1085.52,4453.02 1390.89,4758.39 1390.89,4874.45 1395.89,4879.45 1395.89,5119.45 1397.78,5117.56 2756.84,5117.56 2754.77,2703 1975.89,2703 1975.89,1869.45 2756.84,1869.45
VSS on Bottom Layer "Top Layer-No Net" (solid, remove dead copper, pour order 12): 993.67,3714.33 963.67,3684.33 792.01,3684.33 663.67,3555.98 663.67,3249.33 698.67,3214.33 1058.67,3214.33 1103.67,3169.33 1103.67,3009.33 1105.71,3009.33 1113.67,3001.37 1226.62,3001.37 1284.13,2943.87 1284.13,2784.45 1215.68,2716 -1.33,2716 -1.33,5117.44 993.67,5117.44
TOUCH_PAD2 on Bottom Layer "Top Layer-No Net" (hatched 90Degree grid 20 track 5, pour order 4): 590,2302.06 590,2330 540,2455 395,2525 360,2510 252.24,2456.12 190.68,2309.32 252.24,2190 375,2125 388.92,2117.63 405,2125 525,2180 582.06,2302.06
TOUCH_PAD1 on Bottom Layer "Top Layer-No Net" (hatched 90Degree grid 20 track 5, pour order 6): 2565,2307.06 2565,2335 2515,2460 2370,2530 2335,2515 2227.24,2461.12 2165.68,2314.32 2227.24,2195 2350,2130 2363.92,2122.63 2380,2130 2500,2185 2557.06,2307.06

## Keep-outs
Keep-Out Layer:
  the board outline again, w10

## Other copper
Top Layer:
  region net VSS: 525,3170.05 453.23,3170.05 453.23,2980 525,2980
  region net VSS: 470,3910 385,3910 385,3525 470,3525
  region net VSS: 345,4115 45,4115 45,3980 345,3980
  region net VSS: 695,4345 635,4345 635,4145 695,4145
  region net VSS: 715,4190 495,4190 495,4134.69 715,4134.69
  region net VSS: 425,4960 30,4960 30,4415 425,4415
  region net +5V: 1210,4980 1030,4980 1030,4280 1210,4280
  region net +5V: 1120,4320 1070,4320 1070,3812.13 1120,3812.13
  region net +3V3: 985,4610 865,4610 865,4100 985,4100
  region net +3V3: 1050,4195 760,4195 760,3865 1050,3865
Bottom Layer:
  region net VSS: 520,3095 440,3095 440,2990 520,2990
  region net VSS: 460,3910 380,3910 380,3725 460,3725
  region net VSS: 335,4153.28 17.33,4153.28 17.33,3985 335,3985
  region net VSS: 735,4375 455,4375 455,4085 735,4085
  region net VSS: 435,5000 35,5000 35,4385 435,4385

## Silkscreen, mask and mechanical layers (free items; w line width, h text height)
Top Overlay:
  circle w10: c1560,615 r54.08
  circle w10: c1815,5005 r12.6
  circle w10: c1515,4905 r12.6
  circle w10: c1615,4905 r12.6
  circle w10: c1715,5005 r12.6
  circle w10: c1715,4905 r12.6
  circle w10: c1616.18,5005 r12.6
  circle w10: c1815,4905 r12.6
  circle w10: c1515,5005 r12.6
  lines w10: 1303.19,3923.11 1303.19,5064.84 1893.74,5064.84 1893.74,3923.11 1303.19,3923.11
  text "+PWR +5V A  B  OW  GND" at 490,3650 h30
  text "+PWR +5V A  B  OW  GND" at 490,3170 h30
  text "I-MEDIA GROUP d.o.o. Sarajevo, FBiH, BiH / www.imedia.ba              info@imedia.ba" at 205,710 h60
  text "M" at 1530,575 h60
  text "LUX" at 1145,520 h118.11
  text "Hotel Room Access Controll Unit" at 495,360 h60
  text "HW: 3_18 / PR: DE-290815" at 295,45 h30
  text "SEPTEMBER 2017." at 2255,45 h30
Bottom Overlay:
  lines w10: 157.48,2834.65 157.48,2716.54 354.33,2716.54 354.33,2834.65 ; 1062.99,2834.65 1062.99,2716.54 1259.84,2716.54 1259.84,2834.65 ; 1279.53,1102.36 1279.53,984.25 1476.38,984.25 1476.38,1102.36 ; 1496.06,2834.65 1496.06,2716.54 1692.91,2716.54 1692.91,2834.65 ; 2401.57,2834.65 2401.57,2716.54 2598.43,2716.54 2598.43,2834.65 ; 0,1870.08 2755,1870.08 2755,2834.65 0,2834.65 0,1870.08 ; 0,3149.61 2755.91,3149.61 2755.91,5118.11 0,5118.11 0,3149.61 ; 118.11,3267.72 2440.94,3267.72 2440.94,5000 118.11,5000 118.11,3267.72
  lines w19.68: 787.4,1870.08 787.4,2814.96 ; 1968.5,1870.08 1968.5,2814.96 ; 826.77,5 826.77,1102.36 1929.13,1102.36 1929.13,5 826.77,5

## Dimensions
2755.91,5118.11 to 2755.91,0 on Mechanical 1
0,5115 to 2755.91,5115 on Mechanical 1

## Text inside footprints (layer, text, board x,y; h text height)
P100: Top Overlay "2" at 1875,4885 h19.68; Top Overlay "1" at 1880,5010 h19.68; Top Overlay "7" at 1440,5005 h19.68; Top Overlay "8" at 1440,4900 h19.68
P200: Top Overlay "2" at 502.95,3035 h19.68; Top Overlay "1" at 507.95,2935 h19.68; Top Overlay "33" at 2237.95,2925 h19.68; Top Overlay "34" at 2237.95,3025 h19.68